# Altium PCB USB_Serial.PcbDoc
Units mil, origin at the board's own origin, x right, y up, seen from the top; angles counter-clockwise.
Board outline 24000 x 20000 mil, 2 copper layers (Top Layer, Bottom Layer); 25 components, 23 nets, 99 pads, 15 vias.
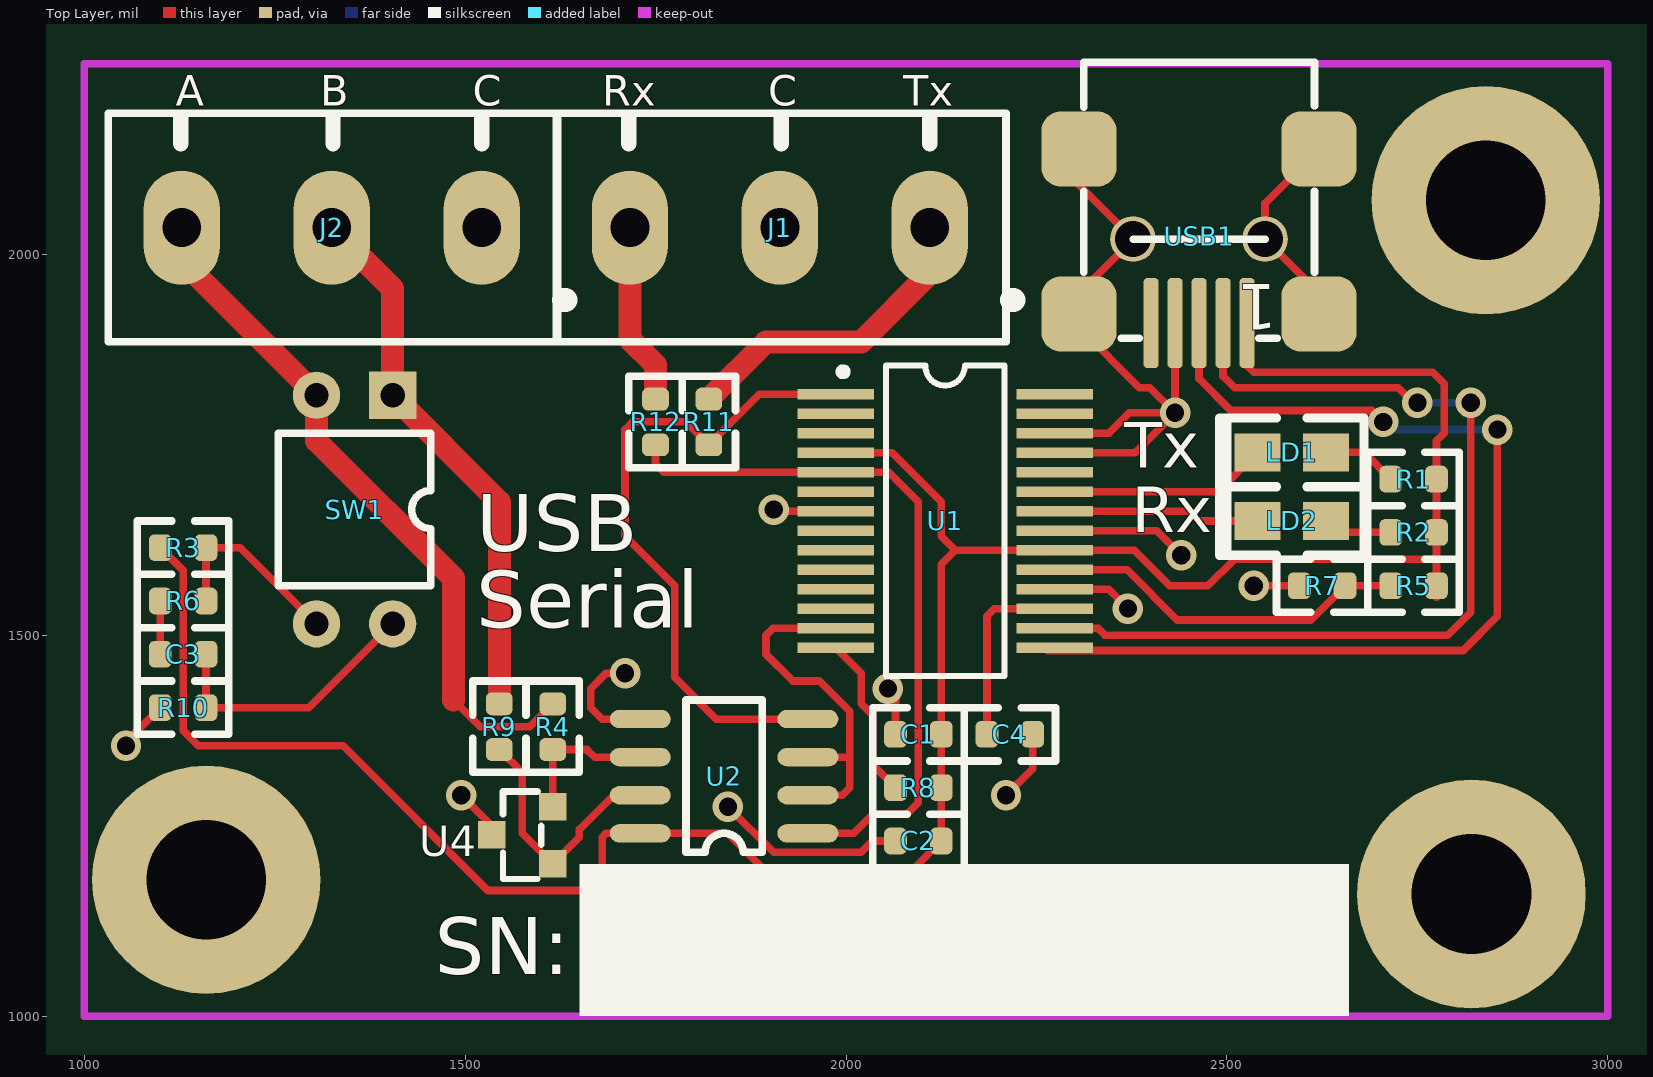
[diagram p0: Top Layer view]
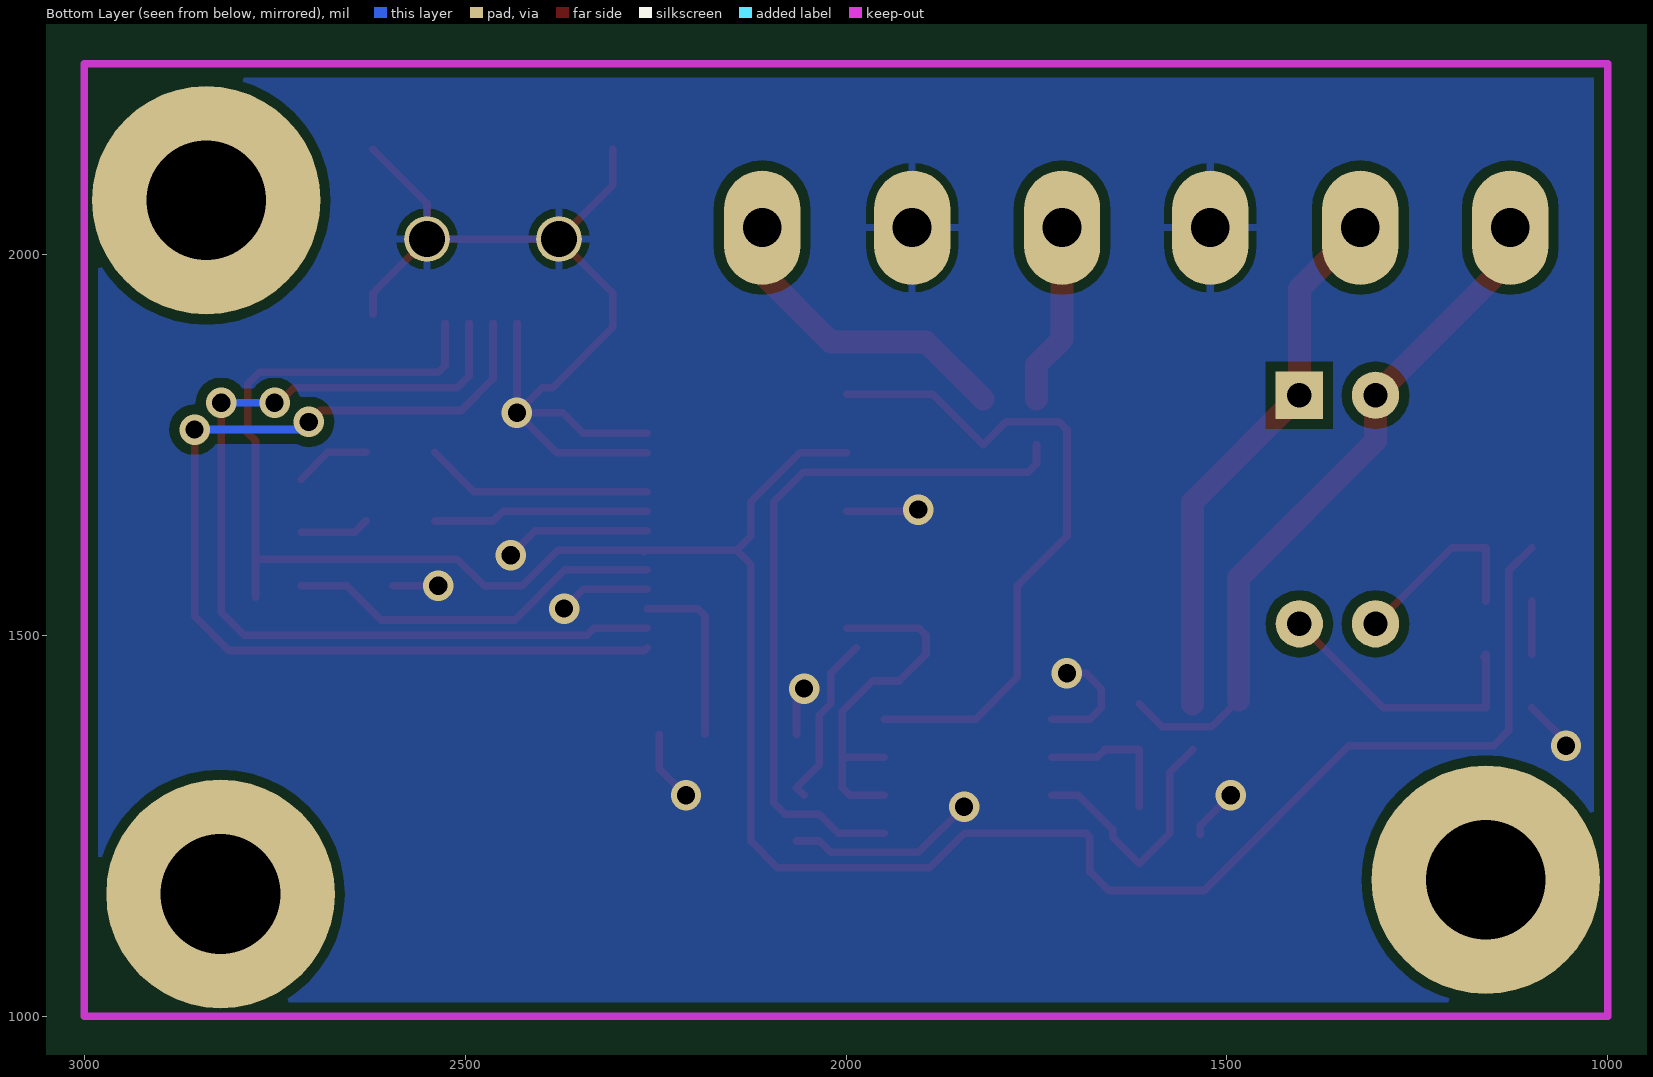
[diagram p1: Bottom Layer view, seen from below]

## Layer stack, top to bottom
Top Layer: signal copper 1.4
Dielectric: dielectric 12.6, FR-4, Dk 4.8
Bottom Layer: signal copper 1.4

## Board outline
0,0 24000,0 24000,20000 0,20000

## Design rules (kind name [scope] priority, off if disabled: settings)
Clearance Clearance_poly [InPoly] p1: gap=13
Clearance [All] p2: gap=7
ComponentClearance [All] p1 off: gap=10 collisioncheckmode=3 verticalgap=10 showdistances=FALSE
FabricationTestPointUsage TestPointUsage [All] p1: valid=0 allowmultiple=FALSE
FabricationTestpoint Testpoint [All] p1: side=3 testpointundercomponent=TRUE minsize=40 maxsize=100 preferedsize=60 minholesize=0 maxholesize=40 preferedholesize=32 testpointgrid=1 allowsidetop=TRUE allowsidebottom=TRUE usegrid=TRUE gridtolerance=0.01
HoleSize [All] p1: absolutevalues=TRUE maxlimit=300 minlimit=24 maxpercent=80.000 minpercent=20.000
MinimumAnnularRing [All] p1: minimumring=6
PlaneClearance [All] p1: clearance=12
PolygonConnect PolygonConnect_via [IsVia] p1: connectstyle=Direct reliefconductorwidth=10 reliefentries=4 polygonreliefangle="90 Angle" airgapwidth=10
PolygonConnect [All] p2: connectstyle=Relief reliefconductorwidth=10 reliefentries=4 polygonreliefangle="90 Angle" airgapwidth=10
RoutingVias [All] p1: holewidth=24 width=40 viastyle="Through Hole" minholewidth=24 minwidth=35 maxholewidth=28 maxwidth=50
SilkscreenOverComponentPads [All vs (IsText AND OnLayer('Top Overlay'))] p1: minsilkscreentomaskgap=10
SolderMaskExpansion [All] p1: expansion=4
Width [All] p1: maxlimit=150 minlimit=10 preferedwidth=10
22 further rules are at their usual default settings.

## Components (designator, comment, footprint, x,y, rotation, side; value= is the part's Value field where it differs from the comment)
C1 "100n" 0603 2065,1370 r0 top
C2 "100n" 0603 2125,1230 r180 top
C3 "4n7" 0603 1100,1475 r0 top
C4 "100n" 0603 2245,1370 r180 top
J1 "CON3" TERMS5mm3 2110,2035 r180 top
J2 "CON3" TERMS5mm3 1521.85,2035 r180 top
LD1 "GRN" 0805DIODE 2540,1740 r0 top
LD2 "YEL" 0805DIODE 2540,1650 r0 top
R1 "330R" 0603 2775,1705 r180 top
R2 "330R" 0603 2775,1635 r180 top
R3 "1k" 0603 1100,1615 r0 top
R4 "10R" 0603 1615,1350 r90 top
R5 "4k7" 0603 2775,1565 r180 top
R6 "120R" 0603 1100,1545 r0 top
R7 "10k" 0603 2595,1565 r0 top
R8 "10k" 0603 2125,1300 r180 top
R9 "10R" 0603 1545,1350 r90 top
R10 "1k" 0603 1160,1405 r180 top
R11 "100R" 0603 1820,1750 r90 top
R12 "100R" 0603 1750,1750 r90 top
SW1 "SW-DIP2" DIP4 1405,1815 r270 top
U1 "FT232R" SSOP28W-handsolder 2130,1650 r270 top
U2 "MAX3483ECSA" so-8 1950,1240 r180 top
U4 "SM712" SOT-23 1615,1200 r90 top
USB1 "USB-B" USB_MINI_B 2550,2020 r180 top

## Footprints (in the part's own frame and the unit in brackets; to place one, negate y for a bottom-side part, rotate by r counter-clockwise, add the part's x,y. Pads: shape width x height; smd on the part's side, far side on the other; paste and mask are expansions set on the pad)
0603 [mil]
  rrect50% 30x35 smd: 1(0,0) 2(60,0)
  silkscreen extent -30,-35 90,35
0805DIODE [mil]
  rect 60x50 smd: A(90,0) K(0,0)
  silkscreen extent -50,-45 140,45
DIP4 [mil]
  rect 62x62 hole 32: 1(0,0)
  round 62 hole 32: 2(0,-100) 3(300,-100) 4(300,0)
  silkscreen extent 50,-150 250,50
so-8 [mil]
  oval 80x24 smd: 1(0,0) 2(0,-50) 3(0,-100) 4(0,-150) 5(220,-150) 6(220,-100) 7(220,-50) 8(220,0)
  silkscreen extent 60,-175 160,25
SOT-23 [mil]
  rect 36x36 smd: 1(0,0) 2(75,0) 3(38,80)
  silkscreen extent -20,15 95,65
SSOP28W-handsolder [mm]
  rect 0.35x2.55 smd: 1(-4.225,-3.65) 2(-3.575,-3.65) 3(-2.925,-3.65) 4(-2.275,-3.65) 5(-1.625,-3.65) 6(-0.975,-3.65) 7(-0.325,-3.65) 8(0.325,-3.65) 9(0.975,-3.65) 10(1.625,-3.65) 11(2.275,-3.65) 12(2.925,-3.65) 13(3.575,-3.65) 14(4.225,-3.65) 15(4.225,3.65) 16(3.575,3.65) 17(2.925,3.65) 18(2.275,3.65) 19(1.625,3.65) 20(0.975,3.65) 21(0.325,3.65) 22(-0.325,3.65) 23(-0.975,3.65) 24(-1.625,3.65) 25(-2.275,3.65) 26(-2.925,3.65) 27(-3.575,3.65) 28(-4.225,3.65)
  silkscreen extent -5.18,-3.52 5.17,1.98
TERMS5mm3 [mil]
  oval 100x150 hole 51: 1(0,0) 2(196.85,0) 3(393.7,0)
  silkscreen extent -110,-150 490,150
USB_MINI_B [mm]
  rrect50% 2.5x2.5 smd: 0(-1.8,2.5) 0(-1.8,-3) 0(6.2,2.5) 0(6.2,-3)
  round 1.524 hole 1.2: 0(0,0) 0(4.4,0)
  rrect50% 0.5x3 smd: 1(0.6,2.8) 2(1.4,2.8) 3(2.2,2.8) 4(3,2.8) 5(3.8,2.8)
  silkscreen extent -1.65,-5.9 6.05,3.3

## Part data
C1 C2 C3 C4: library part CAP
LD1 LD2: library part LED
R1 R2 R3 R4 R5 R6 R7 R8 R9 R10 R11 R12: library part RES8
U2: library part MAX487, "RS485 Transceiver"
U4: "RS485 Transorb"

## Free pads (board coordinates)
  round 300 hole 157 paste+0: ""(1160.39,1179.09) ""(2820.91,1160.39) ""(2839.61,2070.91)

## Via types
v1: diameter 40, hole 24, Top Layer to Bottom Layer, tented both sides, 15 vias

## Nets (pads, with @x,y where several pads share a name; then routed paths per layer and width w, separated by ;. In a path a pad name is that pad's centre, name@x,y a point inside that pad or via, vN(x,y) a via of type N, cw(c..) or ccw(c..) an arc to the next point about the centre after c; other vN are vias at no path point)
+5: C1.2 C2.1 R1.1 R2.1 R3.1 R5.1 R8.1 U1.4 U1.20 U2.8 USB1.1 | length 3394.2
  Top Layer w10: R3.1 1130,1585 1130,1375 1150,1355 1340,1355 1530,1165 1655,1165 1680,1190 1680,1235 1685,1240 U2.8 ; U2.8@1725,1240 U2.8 ; U1.4@1999.09,1739.57 2060.43,1739.57 2125,1675 2125,1630 2143.39,1611.61 ; 2125,1445 C1.2 ; U1.20@2265,1610 U1.20@2263.39,1611.61 ; USB1.1 2526.38,1853.62 2535,1845 2770,1845 2785,1830 2785,1765 2775,1755 R1.1 R2.1 R5.1 R5.1@2775,1550 ; 2775,1600 2510,1600 2475,1565 2425,1565 2378.39,1611.61 U1.20@2263.39,1611.61 ; U2.8 1845,1240 1890,1195 2090,1195 C2.1 R8.1 C1.2 ; C1.2 2125,1593.23 2143.39,1611.61 ; 2143.39,1611.61 U1.20@2263.39,1611.61
GND: C1.1 C2.2 C4.1 J1.2 J2.1 R7.1 R10.2 U1.7 U1.18 U1.21 U1.25 U1.26 U2.5 U4.3 USB1.0 USB1.4 | length 2611.2
  Top Layer w10: v1(1055,1355) 1055,1360 R10.2 ; v1(1495,1290) 1535,1250 U4.3 ; v1(1710,1450) 1685,1450 1665,1430 1665,1405 1680,1390 U2.5 ; v1(1845,1275) 1905,1215 2020,1215 2035,1230 C2.2 ; v1(1905,1665) 1907.2,1662.8 U1.7@1999.09,1662.8 ; v1(2055,1430) 2065,1420 C1.1 ; v1(2210,1290) 2245,1325 C4.1 ; U1.18@2260.91,1560.43 2344.57,1560.43 v1(2370,1535) ; U1.21@2260.91,1637.2 2407.8,1637.2 v1(2440,1605) ; U1.25@2260.91,1739.57 2379.57,1739.57 v1(2431.89,1791.89) ; U1.26@2260.91,1765.16 U1.26@2315.16,1765.16 ; U1.26 2345.16,1765.16 2371.89,1791.89 v1(2431.89,1791.89) ; USB1.0@2305.91,2138.11 2305.91,2090.87 USB1.0@2376.77,2020 ; USB1.4 v1(2431.89,1791.89) ; v1(2535,1565) R7.1 ; USB1.0@2620.87,1921.57 2620.87,1949.13 USB1.0@2550,2020 ; USB1.0@2620.87,2138.11 2550,2067.24 USB1.0@2550,2020 ; USB1.0@2376.77,2020 USB1.0@2550,2020 ; USB1.0@2376.77,2020 2305.91,1949.13 2305.91,1921.57 2305.91,1904.09 2385,1825 2398.78,1825 v1(2431.89,1791.89)
NetC3_1: C3.1 R6.1 | length 70
  Top Layer w10: C3.1 R6.1
NetC3_2: C3.2 R10.1 SW1.4 | length 364.8
  Top Layer w10: C3.2@1163,1472 C3.2 R10.1 1295,1405 SW1.4
NetC4_2: C4.2 U1.17 | length 235
  Top Layer w10: C4.2 2185,1525 2194.84,1534.84 U1.17@2260.91,1534.84
NetJ1_1: J1.1 R11.2 | length 418.3
  Top Layer w30: R11.2 1895,1885 2020,1885 2110,1975 J1.1
NetJ1_3: J1.3 R12.2 | length 239
  Top Layer w30: J1.3 1716.3,1888.7 1750,1855 R12.2
NetLD1_A: LD1.A R1.2 | length 99.5
  Top Layer w10: LD1.A 2680,1740 R1.2
NetLD2_A: LD2.A R2.2 | length 91.2
  Top Layer w10: LD2.A 2645,1635 R2.2
NetR3_2: R3.2 R6.2 SW1.3 | length 256.4
  Top Layer w10: R6.2 R3.2 1205,1615 SW1.3
NetR4_1: R4.1 U2.6 U4.2 | length 194.1
  Top Layer w10: U4.2 R4.1 1660,1350 1670,1340 U2.6
NetR5_2: R5.2 R7.2 U1.19 | length 500.1
  Top Layer w10: U1.19@2260.91,1586.02 2368.98,1586.02 2435,1520 2610,1520 R7.2 R5.2
NetR9_1: R9.1 U2.7 U4.1 | length 337.1
  Top Layer w10: R9.1 1575,1320 1575,1240 U4.1 1650,1235 1650,1245 1695,1290 U2.7
RS485A: J2.3 R4.2 SW1.2 | length 924.7
  Top Layer w10: 1485,1415 1520,1380 1585,1380 R4.2
  Top Layer w30: J2.3 1128.15,1991.85 SW1.2 1305,1755 1485,1575 1485,1415
RS485B: J2.2 R9.2 SW1.1 | length 716.1
  Top Layer w30: J2.2 1405,1955 SW1.1 1545,1675 1545,1515 R9.2
RXD: R12.1 U1.5 U2.1 | length 947.3
  Top Layer w10: R12.1 1750,1725 1761.02,1713.98 1999.09,1713.98 2056.02,1713.98 2095,1675 2095,1280 2080,1265 2035,1265 2010,1240 U2.1
RXD_LED: LD2.K U1.22 | length 284.4
  Top Layer w10: U1.22@2260.91,1662.8 2450,1662.8 2462.8,1650 LD2.K
RXEN: R8.2 U1.14 | length 230.4
  Top Layer w10: U1.14 2009.51,1460.45 ; 2009.55,1460.45 2020,1450 2020,1410 2035,1395 2035,1330 R8.2 R8.2@2055,1290
TXD: R11.1 U1.1 U2.4 | length 882.8
  Top Layer w10: U2.4 1830,1390 1775,1445 1775,1565 1710,1630 1710,1770 1720,1780 1790,1780 R11.1 1886.34,1816.34 U1.1@1999.09,1816.34
TXD_LED: LD1.K U1.23 | length 300.5
  Top Layer w10: U1.23@2260.91,1688.39 2488.39,1688.39 LD1.K
TXEN: U1.13 U2.2 U2.3 | length 488.1
  Top Layer w10: U2.2 1995,1290 2005,1300 2005,1340 ; U2.3 1985,1340 2005,1340 ; U1.13@1999.09,1509.25 U1.13 1904.25,1509.25 1895,1500 1895,1475 1930,1440 1965,1440 2005,1400 2005,1340
USB_DM: U1.16 USB1.2 | length 1254.7
  Top Layer w10: U1.16@2260.91,1509.25 2330.75,1509.25 2340,1500 2790,1500 2820,1530 v1(2820,1805) ; USB1.2 2494.88,1840.12 2510,1825 2725,1825 v1@2745,1805
  Bottom Layer w10: v1(2750,1805) v1(2820,1805)
USB_DP: U1.15 USB1.3 | length 1351.6
  Top Layer w10: U1.15@2260.91,1483.66 2264.57,1480 2810,1480 2855,1525 v1(2855,1770) ; USB1.3 2463.39,1836.61 2505,1795 2690,1795 v1(2705,1780)
  Bottom Layer w10: v1(2705,1780) 2715,1770 v1(2855,1770)
pads on no net: U1.2 U1.3 U1.6 U1.8 U1.9 U1.10 U1.11 U1.12 U1.24 U1.27 U1.28 USB1.5

## Polygon pours and split planes (outlines as drawn)
GND on Bottom Layer "GND" (solid, remove dead copper, pour order 2): 1000,1000 3000,1000 3000,2250 1000,2250

## Keep-outs
Keep-Out Layer:
  lines w10: 1000,1000 1000,2250 3000,2250 3000,1000 1000,1000

## Silkscreen, mask and mechanical layers (free items; w line width, h text height)
Top Overlay:
  rectangle: 1650,1000 2660,1200
  text "A" at 1120,2195 h40
  text "B" at 1310,2195 h40
  text "C" at 1510,2195 h40
  text "Rx" at 1680,2195 h40
  text "C" at 1898.15,2195 h40
  text "Tx" at 2075,2195 h40
  text "Tx" at 2365,1720 h60
  text "Rx" at 2375,1635 h60
  text "USB" at 1515,1610 h75
  text "Serial" at 1515,1510 h75
  text "SN:" at 1460,1055 h75
Mechanical 1:
  lines w10: 1000,1000 3000,1000 3000,2250 1000,2250 1000,1000

## Dimensions
1000,1000 to 1000,2250 on Mechanical 3
1000,1000 to 3000,1000 on Mechanical 3

## Text inside footprints (layer, text, board x,y; h text height)
USB1: Top Overlay "1" at 2565.75,1960.94 h60 r180